# Altium PCB smd_practice_board.PcbDoc
Units mil, origin at the board's own origin, x right, y up, seen from the top; angles counter-clockwise.
Board outline 6000 x 4000 mil, 2 copper layers (Top Layer, Bottom Layer); 19 components, 0 nets, 38 pads, 0 vias.
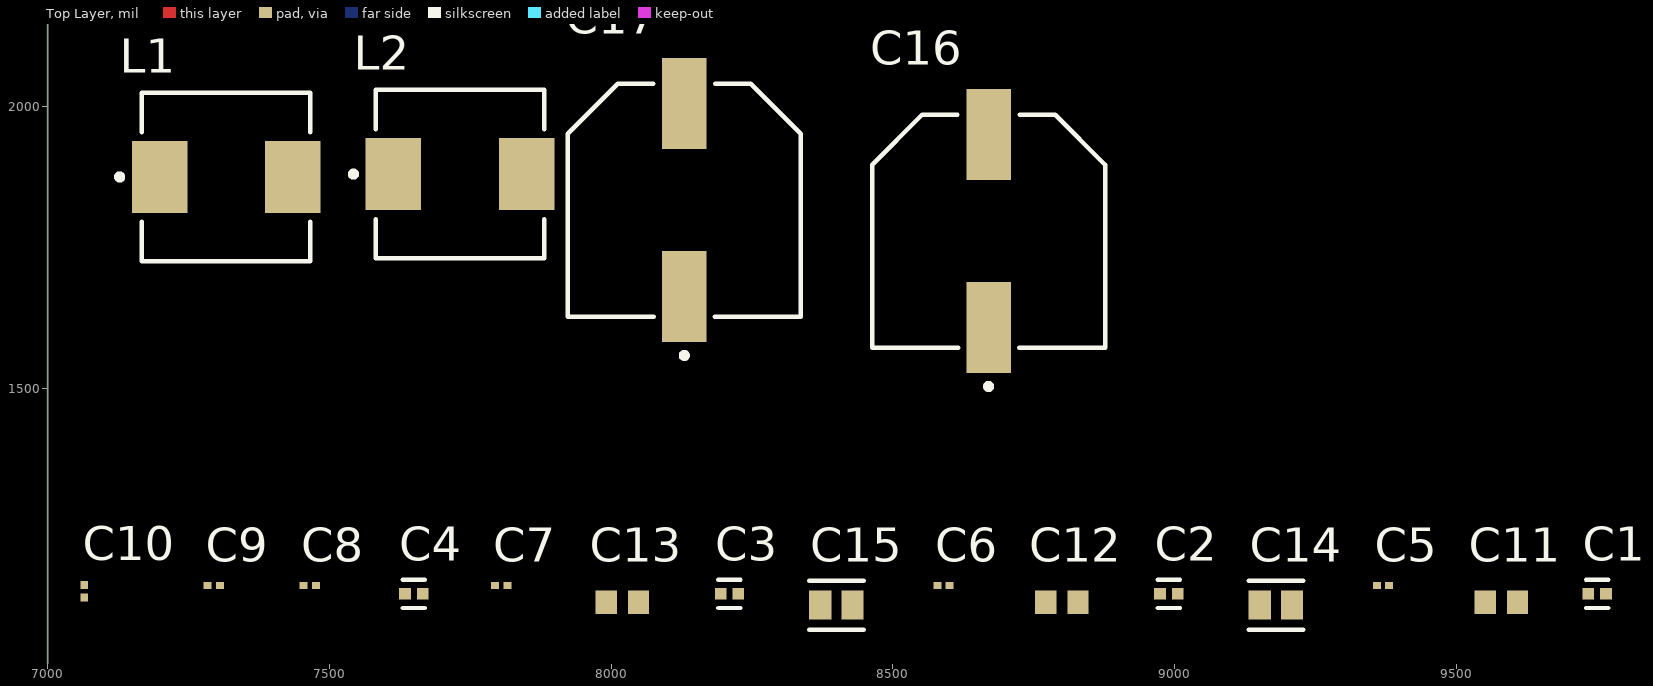
[diagram p0: Top Layer view]
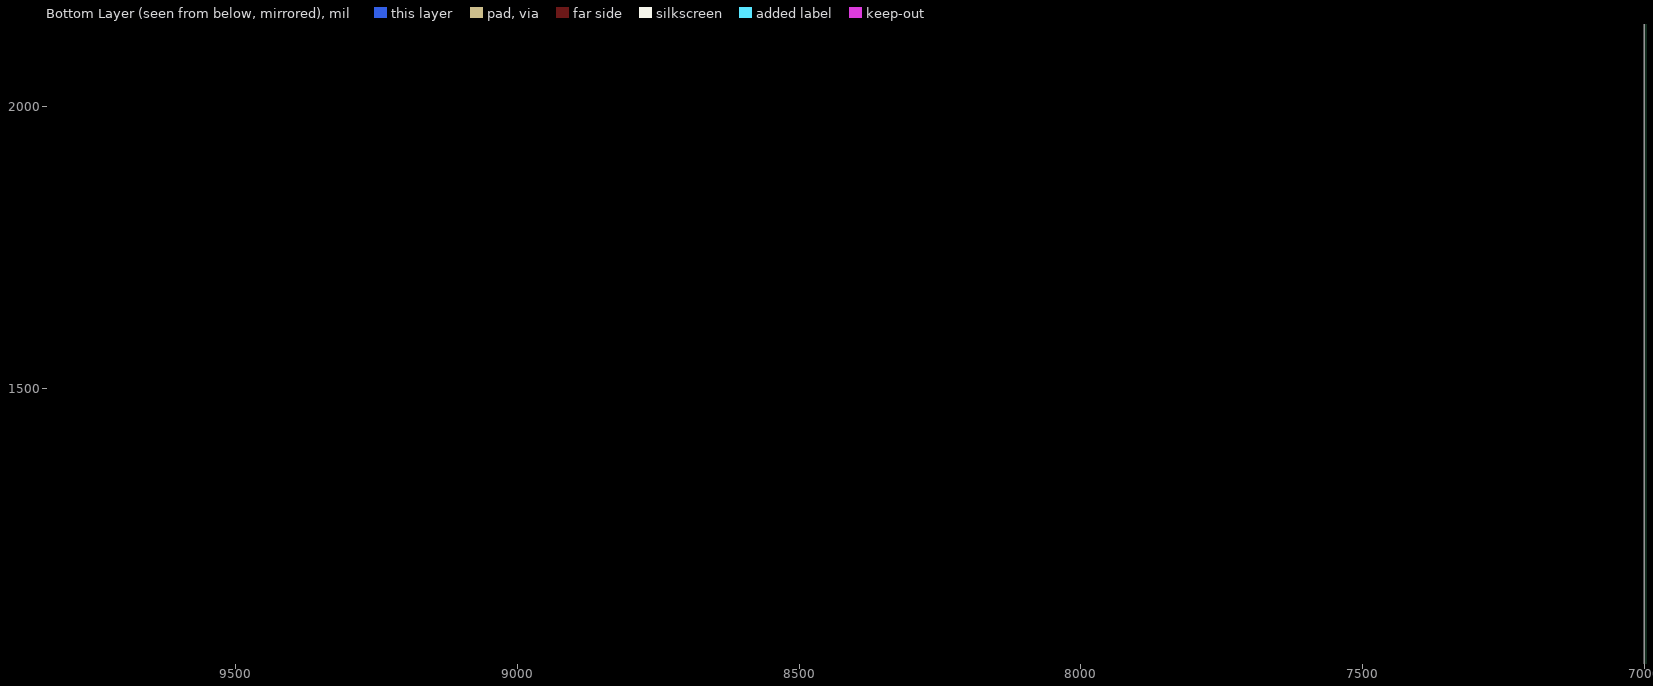
[diagram p1: Bottom Layer view, seen from below]

## Layer stack, top to bottom
Top Solder: solder mask 0.4, Solder Resist, Dk 3.5
Top Layer: signal copper 1.4
Dielectric 1: dielectric 12.6, FR-4, Dk 4.8
Bottom Layer: signal copper 1.4
Bottom Solder: solder mask 0.4, Solder Resist, Dk 3.5

## Board outline
1000,1000 7000,1000 7000,5000 1000,5000

## Design rules (kind name [scope] priority, off if disabled: settings)
Clearance [All] p1: gap=10 ignorepadtopadclearanceinfootprint=FALSE except(0: Arc-Hole Track-Hole SMDPad-Hole THPad-Hole Via-Hole Fill-Hole Poly-Hole Region-Hole Text-Hole)
PolygonConnect [All] p1: connectstyle=Relief reliefconductorwidth=10 reliefentries=4 polygonreliefangle="90 Angle" airgapwidth=10
RoomDefinition Main [InComponentClass('Main')] p1: confinementstyle=ConfineIn formatcopy=TRUE lockcomponents=FALSE outline 7045,1060 9820,1060 9820,2265 7045,2265
RoutingVias [All] p1: holewidth=28 width=50 viastyle="Through Hole" minholewidth=28 minwidth=50 maxholewidth=28 maxwidth=50
SolderMaskExpansion [All] p1: expansion=4 istentingtop=FALSE
Width [All] p1: maxlimit=10 minlimit=10 preferedwidth=10
30 further rules are at their usual default settings.

## Components (designator, comment, footprint, x,y, rotation, side; value= is the part's Value field where it differs from the comment)
C1 "C0402C104K8PACTU" FP-C0402-BB-MFG 9750,1135 r0 top value="0.10 μF"
C2 "C0402C104K8PACTU" FP-C0402-BB-MFG 8990,1135 r0 top value="0.10 μF"
C3 "C0402C104K8PACTU" FP-C0402-BB-MFG 8210,1135 r0 top value="0.10 μF"
C4 "C0402C104K8PACTU" FP-C0402-BB-MFG 7650,1135 r0 top value="0.10 μF"
C5 "02016D104KAT2A" CAPC0603X33X15LL03T05 9370,1150 r0 top
C6 "02016D104KAT2A" CAPC0603X33X15LL03T05 8590,1150 r0 top
C7 "02016D104KAT2A" CAPC0603X33X15LL03T05 7805,1150 r0 top
C8 "02016D104KAT2A" CAPC0603X33X15LL03T05 7465,1150 r0 top
C9 "02016D104KAT2A" CAPC0603X33X15LL03T05 7295,1150 r0 top
C10 "02016D104KAT2A" CAPC0603X33X15LL03T05 7065,1140 r90 top
C11 "GRM1885C1H220JA01D" CAPC1608X90X35ML10T15 9580,1120 r0 top
C12 "GRM1885C1H220JA01D" CAPC1608X90X35ML10T15 8800,1120 r0 top
C13 "GRM1885C1H220JA01D" CAPC1608X90X35ML10T15 8020,1120 r0 top
C14 "GRM21BR61E106KA73L" FP-GRM21B-0_15-IPC_C 9180,1115 r0 top
C15 "GRM21BR61E106KA73L" FP-GRM21B-0_15-IPC_C 8400,1115 r0 top
C16 "EEEFP1E471AP" FP-FPG-MFG 8670,1778.74 r90 top
C17 "EEEFP1E471AP" FP-FPG-MFG 8130,1833.74 r90 top
L1 "DR74-4R7-R" COBU-DR74-4R7-R_V 7316.89,1875 r0 top
L2 "DR74-4R7-R" COBU-DR74-4R7-R_V 7731.89,1880 r0 top

## Footprints (in the part's own frame and the unit in brackets; to place one, negate y for a bottom-side part, rotate by r counter-clockwise, add the part's x,y. Pads: shape width x height; smd on the part's side, far side on the other; paste and mask are expansions set on the pad)
CAPC0603X33X15LL03T05 [mm] "Chip Capacitor, 2-Leads, Body 0.60x0.30mm, IPC High Density"
  rect 0.36x0.32 smd: 1(-0.28,0) 2(0.28,0)
  body extent -0.32,-0.17 0.32,0.17, height 0.33
CAPC1608X90X35ML10T15 [mm] "Chip Capacitor, 2-Leads, Body 1.7x0.9mm, IPC Low Density"
  rect 0.95x1.05 smd: 1(-0.725,0) 2(0.725,0)
  body extent -0.85,-0.45 0.85,0.45, height 0.9
COBU-DR74-4R7-R_V [mm] "SMD, 2-Leads, Body 7.6x7.6mm"
  rect 2.5x3.25 smd: 1(-3,0) 2(3,0)
  silkscreen extent -4.92,-3.8 3.8,3.8, body extent -3.8,-3.8 3.8,3.8, height 4.35
FP-C0402-BB-MFG [mm]
  rect 0.52x0.52 smd paste+0 mask+0: 1(-0.4,0) 2(0.4,0)
  silkscreen extent -0.5,-0.64 0.5,0.64, body extent -0.8,-0.4 0.8,0.4, height 0.25
FP-FPG-MFG [mm]
  rect 4.1x2 smd paste+0 mask+0: 1(-4.35,0) 2(4.35,0)
  silkscreen extent -7.12,-5.25 5.25,5.25, body extent -6.65,-5.5 6.65,5.5, height 0.25
FP-GRM21B-0_15-IPC_C [mil]
  rect 39.6x51.5 smd paste+0 mask+0: 1(-28.59,0) 2(28.59,0)
  silkscreen extent -48,-43 48,43, body extent -52,-31 52,31, height 10

## Part data
C1 C2 C3 C4: library part CMP-2008-02046-2, "CAP CER 0.1UF 10V X5R 0402", Capacitance="0.10 μF", Manufacturer=Kemet, Package=C0402-BB, Temperature="-55°C to +125°C", Temperature Characteristic=X5R, Temperature Coefficient=15%, Temperature Range High=+125°C, Temperature Range Low=-55°C, Tolerance=0.1, Voltage Rating="10 V", Automotive=No, Category=Cap, ComponentLink2Description=Datasheet, ComponentLink2URL=https://content.kemet.com/datasheets/KEM_C1002_X7R_SMD.pdf, Device Class L1="Passive Components", Device Class L2=Capacitors, Device Class L3="Ceramic Capacitors", Digikey Description="CAP CER 0.1UF 10V X5R 0402", Height=0.55mm, Ipc Land Pattern Name=CAPC10050X50, Lead Free=Yes, Manufacturer Part Number=C0402C104K8PACTU, Material=Ceramic, Mouser Description="Capacitor 100 nF 10 VDC 0402", Octopart=https://octopart.com/c0402c104k8pactu-kemet-140039, RoHS=TRUE
C5 C6 C7 C8 C9 C10: library part CMP-2010-00159-1, Manufacturer="AVX Interconnect / Elco", Part Number=02016D104KAT2A
C11 C12 C13: library part CMP-2000-04945-1, "Chip Capacitor, 22 pF, +/- 5%, 50 V, -55 to 125 degC, 0603 (1608 Metric), RoHS, Tape and Reel", Capacitance=22pF, Case Size/Dimension=0603, Dielectric=C0G, Manufacturer=Murata, Package Description="2-Pin Surface Mount Device, Body 1.6 x 0.8 mm", Package Reference=603, Rated Voltage=50V, Tolerance (%)=±5%, Datasheet URL=https://datasheet.ciiva.com/11786/0900766b807a1cab-11786398.pdf, Datasheet Version=Jul-06, Manufacturer URL=http://www.murata.com/
C14 C15: library part CMP-2007-03541-2, "Chip Multilayer Ceramic Capacitors for General Purpose, 0805, 10uF, X5R, 15%, 10%, 25V", Capacitance=10uF, Case Code (Imperial)=0805, Case Code (Metric)=2012, Dielectric=X5R, Max Operating Temperature=85°C, Min Operating Temperature=-55°C, Package Quantity=1, Tolerance=10%, Voltage=25V, Case/Package=0805, Depth=1.25mm, Height=1.25mm, Lead Free="Lead Free", Length=2mm, Material=Ceramic, Mount="Surface Mount", Packaging="Tape and Reel", Radiation Hardening=No, Termination=SMD/SMT, Thickness=0.053inch, Voltage Rating=25V, Voltage Rating (DC)=25V, Width=0.049inch
C16 C17: library part CMP-2000-06214-2, "CAP ALUM 470UF 20% 25V SMD", Capacitance=470uF, Case/Package=Radial, ESR (Equivalent Series Resistance)=60mR, Leakage Current=117.5uA, Max Operating Temperature=105°C, Min Operating Temperature=-55°C, Package Quantity=500, Ripple Current=1.19A, Tolerance=20%, Voltage=25V, Construction=Cylindrical, Contact Plating=Tin, Diameter=10mm, Height=10.2mm, Height - Seated (Max)=0.402inch, Lead Free="Lead Free", Lead Pitch=4.6mm, Length=10.5mm, Life (Hours)=2000Hour, Material=Aluminium, Mount="Surface Mount", Number of Pins=2, Packaging="Tape and Reel", Polarity=Polar, Radiation Hardening=No, REACH SVHC="No SVHC", Ripple Current (AC)=1.19A, RoHS Compliant=Yes, Series=FP, Termination=SMD/SMT, Voltage Rating=25V, Voltage Rating (DC)=25V, Width=10.3mm
L1 L2: library part CMP-2000-06180-1, "High Power Density, High Efficiency, Shielded Inductor, 4.7 uH, -40 to 125 degC, RoHS, Tape and Reel", Current - Saturation=4.37A, Current Rating=3.34A, DC Resistance (DCR)=25.4mOhm, Frequency - Self Resonant=-, Frequency - Test=100kHz, Inductance=4.7µH, Manufacturer=Eaton, Operating Temperature=-40°C~125°C, Package / Case=Nonstandard, Package Description="2-Pin Surface Mount Device, Body 7.6 x 7.6 mm", Tolerance=±20%, Category=Inductors,Coils,Chokes, Datasheet URL=https://datasheet.ciiva.com/14667/0900766b8116a153-14667792.pdf, Datasheet Version=12/2012, Family=FixedInductors, Height - Seated (Max)="0.171\"(4.35mm)", Manufacturer URL=http://www.cooperindustries.com/content/public/en/bussmann/electronics.html, Material - Core=Ferrite, Mounting Technology=SurfaceMount, Mounting Type=SurfaceMount, Package Reference=DR74-4R7-R, Packaging=Tape&amp;Reel(TR), Q @ Freq=-, Ratings=-, Series=DR, Shielding=Shielded, Size / Dimension="0.299\"Lx0.299\"W(7.60mmx7.60mm)", Type=Wirewound

## Nets (pads, with @x,y where several pads share a name; then routed paths per layer and width w, separated by ;. In a path a pad name is that pad's centre, name@x,y a point inside that pad or via, vN(x,y) a via of type N, cw(c..) or ccw(c..) an arc to the next point about the centre after c; other vN are vias at no path point)
pads on no net: C1.1 C1.2 C2.1 C2.2 C3.1 C3.2 C4.1 C4.2 C5.1 C5.2 C6.1 C6.2 C7.1 C7.2 C8.1 C8.2 C9.1 C9.2 C10.1 C10.2 C11.1 C11.2 C12.1 C12.2 C13.1 C13.2 C14.1 C14.2 C15.1 C15.2 C16.1 C16.2 C17.1 C17.2 L1.1 L1.2 L2.1 L2.2